# Altium PCB Cold_chain_Logger.PcbDoc (part 2 of 3)
Units mm, origin at the board's own origin, x right, y up, seen from the top; angles counter-clockwise.
Board outline 66 x 99 mm, 4 copper layers (Top Layer, GND Layer, 3.3V layer, Bottom Layer), stack 1.586 mm thick; 118 components, 83 nets, 435 pads, 406 vias.
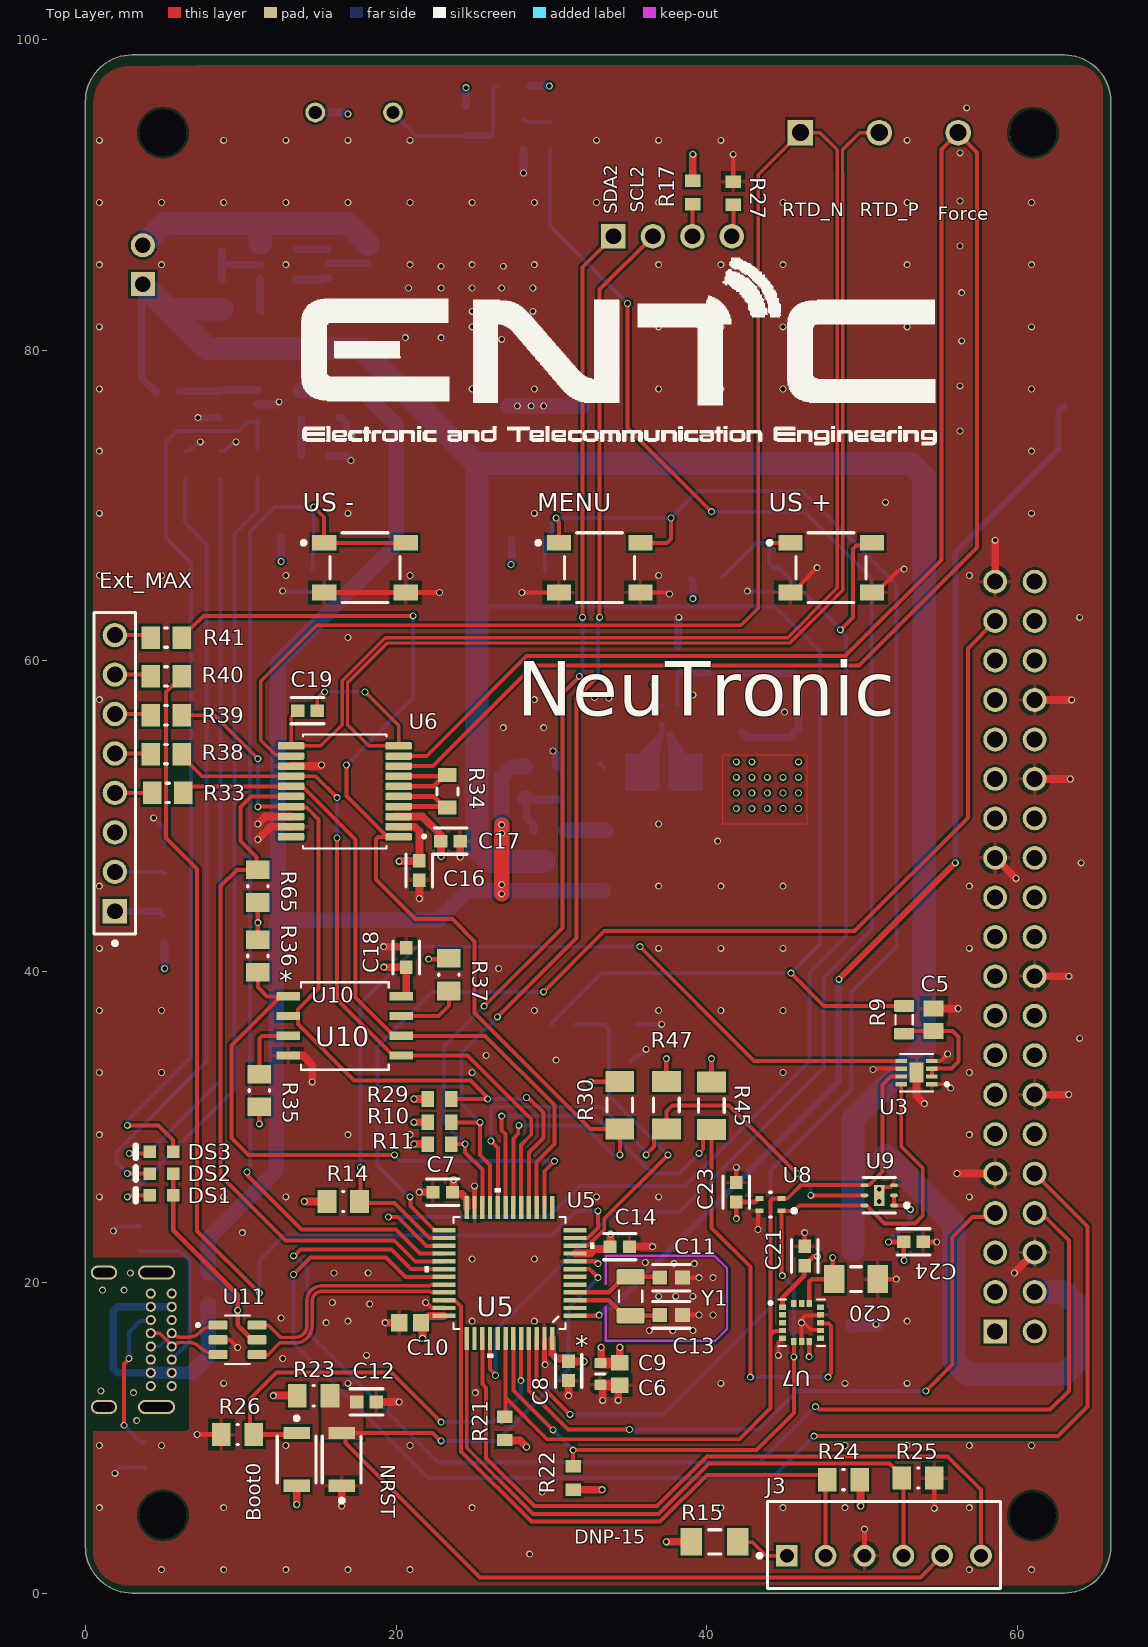
[diagram p0: Top Layer view]

## Part data (continued)
U7: library part CMP-010-00027-1, "Accelerometer X, Y, Z Axis Â±2g, 4g, 8g, 16g 0.5Hz ~ 625Hz 16-LGA (3x3)", Case/Package="LGA-16 STMicroelectronics", Check_prices=https://www.snapeda.com/parts/LIS3DHTR/STMicroelectronics/view-part/278195/?ref=eda, Component Type=Standard, Design Item ID=LIS3DHTR, Digi-Key_Part_Number=497-10613-1-ND, Manufacturer Part Number 1=LIS3DHTR, MF=STMicroelectronics, MP=LIS3DHTR, Pins=14, SnapEDA_Link=https://www.snapeda.com/parts/LIS3DHTR/STMicroelectronics/view-part/278195/?ref=snap, Source=LIS3DHTR.SchLib
U8: library part CMP-010-00025-1, "Humidity And Temperature Sensor, Digital, CMOS, 4 Pin, Plastic/epoxy", Max Operating Temperature=125°C, Max Supply Voltage=3.6V, Min Operating Temperature=-40°C, Min Supply Voltage=1.08V, Mounting Technology="Surface Mount"
U9: library part CMP-04942-000002-1, "SENSOR OPT 550NM AMBIENT 6USON", Manufacturer="Texas Instruments", Max Junction Temp=+150°C, Max Supply Voltage=3.6V, Min Supply Voltage=1.6V, Operating Supply Current=0.3-1.8uA, Package=DNP0006A, Temperature="-40°C to +85°C", Temperature Range High=+85°C, Temperature Range Low=-40°C, Automotive=No, Category=IC, ComponentLink2Description=Datasheet, ComponentLink2URL=http://www.ti.com/lit/ds/symlink/opt3001.pdf, Device Class L1=Sensors, Device Class L2="Optical Sensors", Device Class L3=unset, Digikey Description="SENSOR OPT 550NM AMBIENT 6USON", Height=0.65mm, Ipc Land Pattern Name=DFN200X200X60-6, Lead Free=Yes, Manufacturer Part Number=OPT3001DNPR, Octopart=https://octopart.com/opt3001dnpr-texas+instruments-47324050, RoHS=TRUE, Sensor Output=I2C,SMBus, Standoff Height=0mm
U10: "Description", Manufacturer_Name=Winbond, Copyright="Copyright (C) 2025 Ultra Librarian. All rights reserved.", Manufacturer Part Number 1="W25Q128JVSIQ TR", Manufacturer_Part_Number="W25Q128JVSIQ TR", RefDes=RefDes, Type=Type
U11: library part CMP-004-00033-1, "17V Clamp 5A (8/20Âµs) Ipp Tvs Diode Surface Mount SOT-23-6", Case/Package="SOT-23-6 STMicroelectronics", Availability="In Stock", Check_prices=https://www.snapeda.com/parts/USBLC6-2SC6/STMicroelectronics/view-part/?ref=eda, Component Type=Standard, Design Item ID=USBLC6-2SC6, Manufacturer Part Number 1=USBLC6-2SC6, MF=STMicroelectronics, MP=USBLC6-2SC6, Pins=6, Price=None, Purchase-URL=https://pricing.snapeda.com/search/part/USBLC6-2SC6/?ref=eda, SnapEDA_Link=https://www.snapeda.com/parts/USBLC6-2SC6/STMicroelectronics/view-part/?ref=snap, Source=USBLC6-2SC6.SchLib
Y1: library part CMP-003-00029-1, "Crystal 32.768kHz 10ppm 7pF -40C +85C", Frequency=32.768kHz, Pins=2

## Free pads (board coordinates)
  oval 3x1.524 hole 3 unplated: 5(5,5) 5(5,94) 5(60.981,4.985) 5(61,94)

## Via types
v1: diameter 0.45, hole 0.3, Top Layer to Bottom Layer, tented both sides, 403 vias
v2: diameter 0.5, hole 0.3, Top Layer to Bottom Layer, 2 vias
v3: diameter 0.45/0.45 (per signal layer), hole 0.3, Top Layer to Bottom Layer, tented both sides, 1 vias